# EAGLE board bbwmixer (EAGLE 9.6.2)
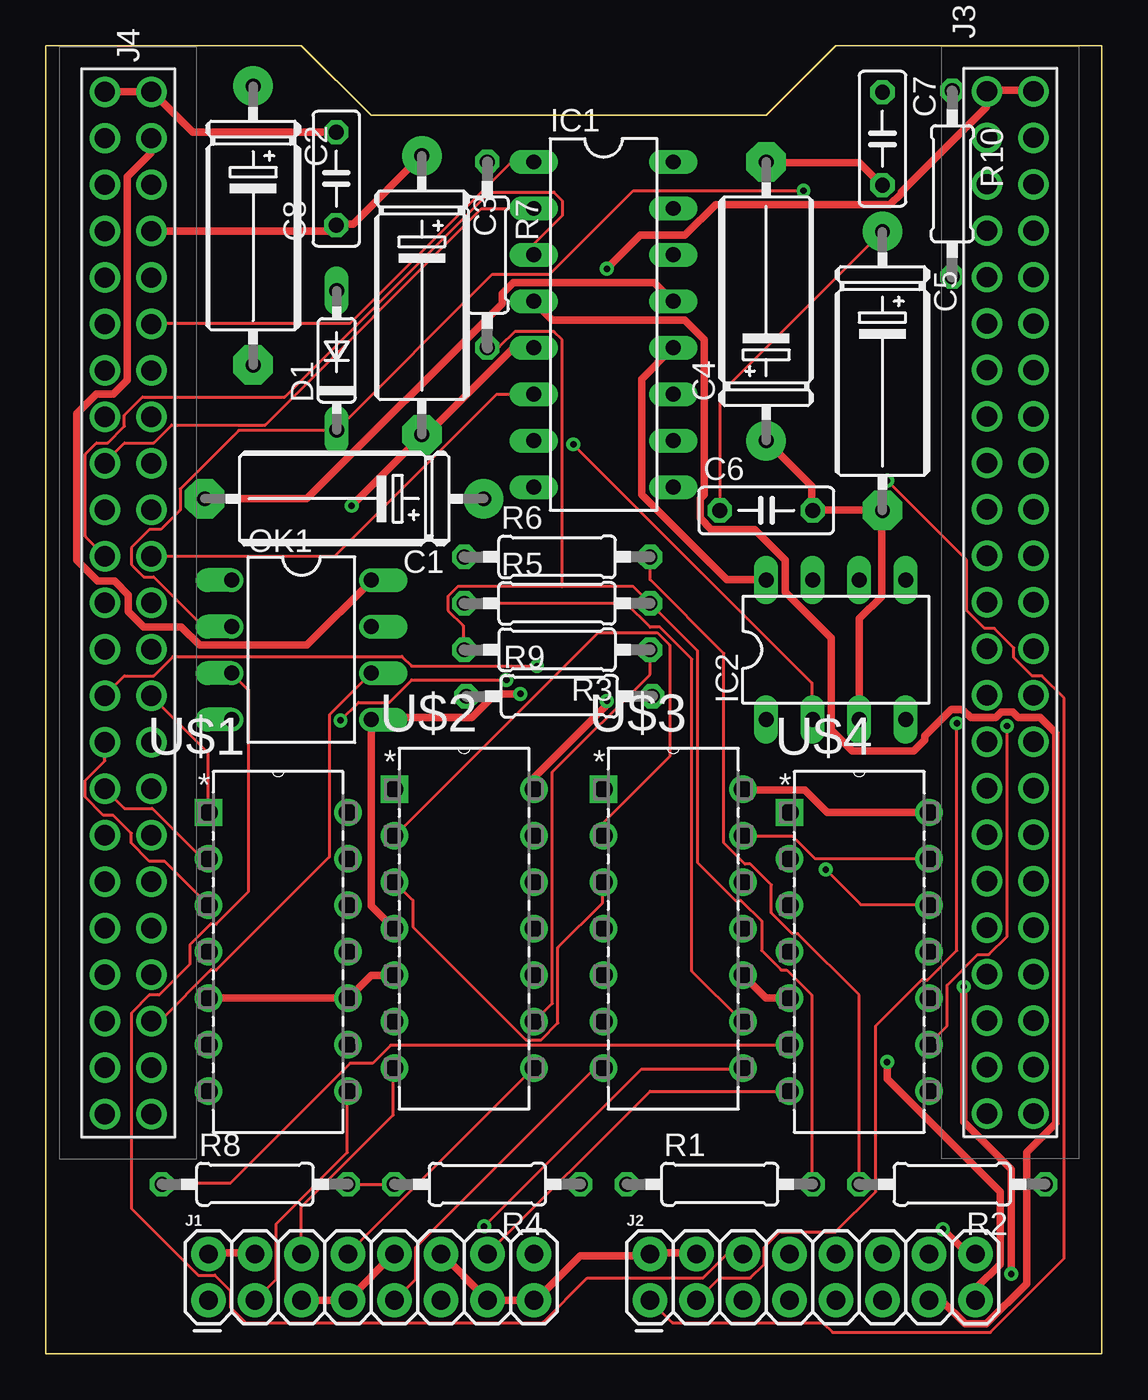
[diagram p0: board, top side]
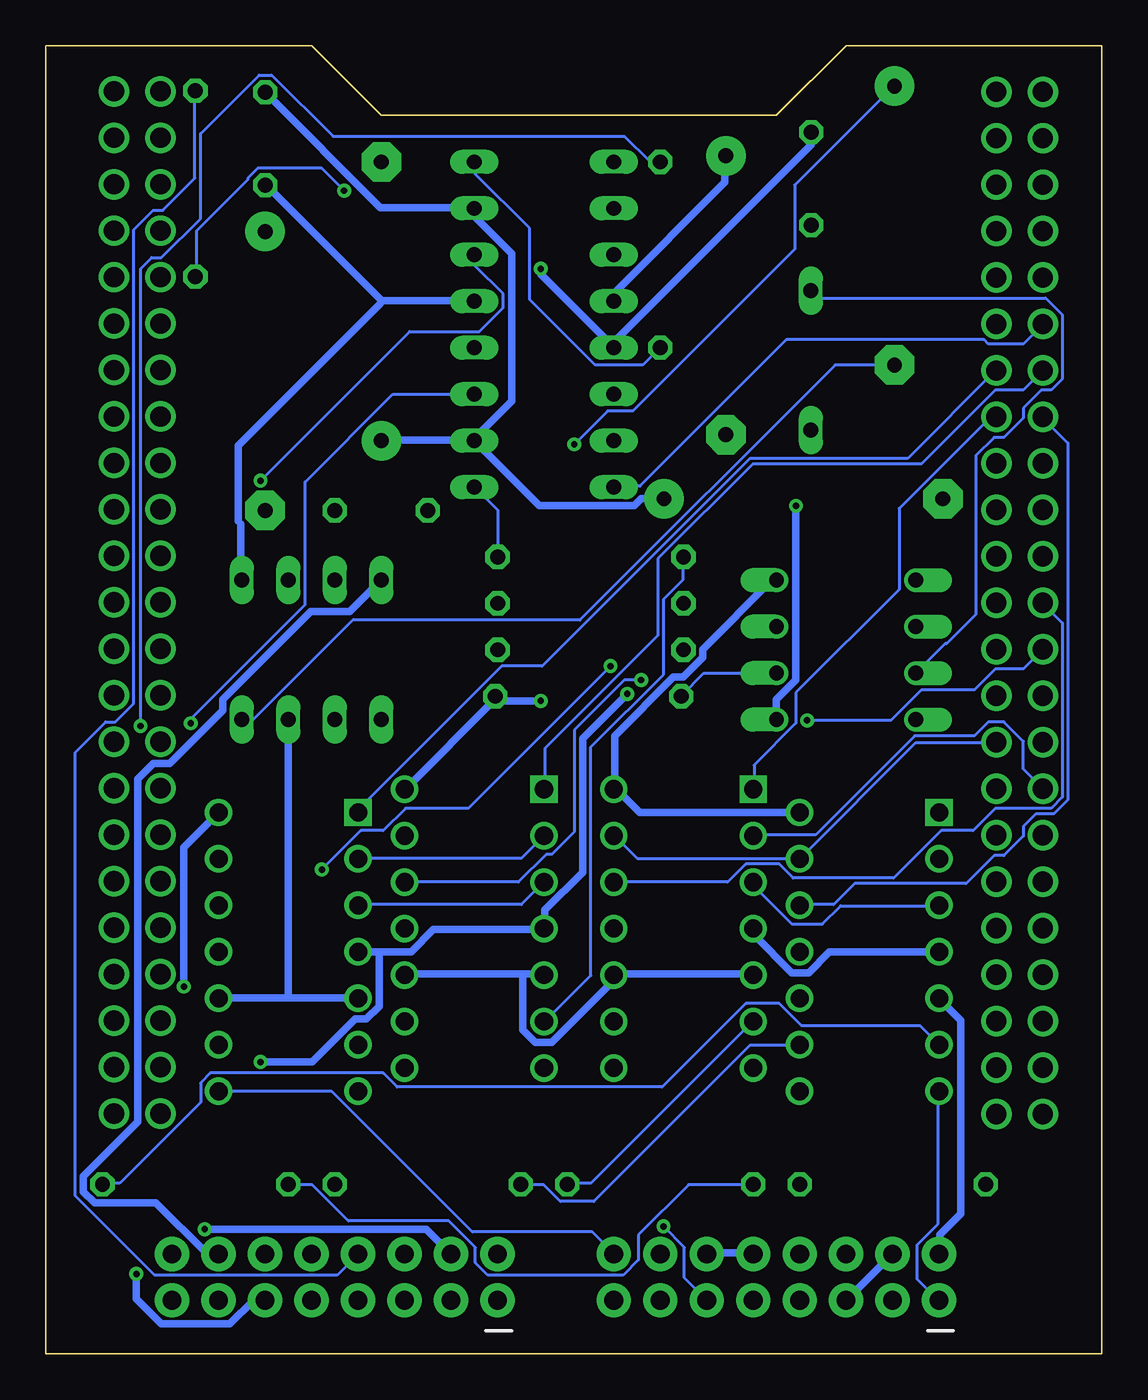
[diagram p1: board, bottom side, seen from below]

Size 57.71 x 71.5 mm. Coordinates in mm from the lower left corner, seen from the top.
Outline: 43.18,71.5 39.37,67.69 17.78,67.69 13.97,71.5 0,71.5 0,0 57.71,0 57.71,71.5 43.18,71.5
Copper layers (1*16): Top 0.035mm / dielectric 1.5mm / Bottom 0.035mm
Design rules "default": minimum track width 6mil, minimum drill 0.35mm, track to track 6mil, track to pad 6mil, pad to pad 6mil, via to via 6mil, smd to smd 6mil, copper to edge 40mil, drill to drill 6mil, minimum pad ring 10mil, minimum via ring 8mil, stop-mask expansion 4mil, vias tented up to drill 0mil, thermal gap 10mil
Net classes: 0 DGND: width 0.152 mm; 1 gordis: width 0.406 mm

## Footprints (pad centres in the part's own frame; a part is rotated, then mirrored left to right if it is on the bottom)
E15-5 = drill 0.813 pad 2.159: + -7.62,0 | drill 0.813 pad 2.159 octagon: - 7.62,0
C050-025X075 = drill 0.813 octagon: 1 -2.54,0; 2 2.54,0
DO35-7 = drill 0.813 long: A 3.81,0; C -3.81,0
DIL16 = drill 0.813 long: 1 -8.89,-3.81; 2 -6.35,-3.81; 3 -3.81,-3.81; 4 -1.27,-3.81; 5 1.27,-3.81; 6 3.81,-3.81; 7 6.35,-3.81; 8 8.89,-3.81; 9 8.89,3.81; 10 6.35,3.81; 11 3.81,3.81; 12 1.27,3.81; 13 -1.27,3.81; 14 -3.81,3.81; 15 -6.35,3.81; 16 -8.89,3.81
DIL08 = drill 0.813 long: 1 -3.81,-3.81; 2 -1.27,-3.81; 3 1.27,-3.81; 4 3.81,-3.81; 5 3.81,3.81; 6 1.27,3.81; 7 -1.27,3.81; 8 -3.81,3.81
2X8 = drill 1.016 pad 1.88: 1 0,0; 2 0,2.54; 3 2.54,0; 4 2.54,2.54; 5 5.08,0; 6 5.08,2.54; 7 7.62,0; 8 7.62,2.54; 9 10.16,0; 10 10.16,2.54; 11 12.7,0; 12 12.7,2.54; 13 15.24,0; 14 15.24,2.54; 15 17.78,0; 16 17.78,2.54
M20-9982346 = drill 1.11 pad 1.65: 1 0,0; 2 0,2.54; 3 2.54,0; 4 2.54,2.54; 5 5.08,0; 6 5.08,2.54; 7 7.62,0; 8 7.62,2.54; 9 10.16,0; 10 10.16,2.54; 11 12.7,0; 12 12.7,2.54; 13 15.24,0; 14 15.24,2.54; 15 17.78,0; 16 17.78,2.54; 17 20.32,0; 18 20.32,2.54; 19 22.86,0; 20 22.86,2.54; 21 25.4,0; 22 25.4,2.54; 23 27.94,0; 24 27.94,2.54; 25 30.48,0; 26 30.48,2.54; 27 33.02,0; 28 33.02,2.54; 29 35.56,0; 30 35.56,2.54; 31 38.1,0; 32 38.1,2.54; 33 40.64,0; 34 40.64,2.54; 35 43.18,0; 36 43.18,2.54; 37 45.72,0; 38 45.72,2.54; 39 48.26,0; 40 48.26,2.54; 41 50.8,0; 42 50.8,2.54; 43 53.34,0; 44 53.34,2.54; 45 55.88,0; 46 55.88,2.54
DIL08' = drill 0.813 offset: 1 -3.81,-3.81; 2 -1.27,-3.81; 3 1.27,-3.81; 4 3.81,-3.81; 5 3.81,3.81; 6 1.27,3.81; 7 -1.27,3.81; 8 -3.81,3.81
0207/10 = drill 0.813 octagon: 1 -5.08,0; 2 5.08,0
DIP254P762X533-14 = drill 0.991 square: 1 -7.62,15.24 | drill 0.991: 2 -7.62,12.7; 3 -7.62,10.16; 4 -7.62,7.62; 5 -7.62,5.08; 6 -7.62,2.54; 7 -7.62,0; 8 0,0; 9 0,2.54; 10 0,5.08; 11 0,7.62; 12 0,10.16; 13 0,12.7; 14 0,15.24

## Placement (x,y rotation side)
C1  10uF  [E15-5]  16.31,46.74 180 top
C2  10uF  [E15-5]  11.33,61.67 270 top
C3  10uF  [E15-5]  20.55,57.86 270 top
C4  10uF  [E15-5]  39.37,57.53 90 top
C5  10uF  [E15-5]  45.72,53.72 270 top
C6  100nF  [C050-025X075]  39.37,46.1 0 top
C7  100nF  [C050-025X075]  45.72,66.42 270 top
C8  100nF  [C050-025X075]  15.88,64.24 90 top
D1  1N4148DO35-7  [DO35-7]  15.9,54.31 90 top
IC1  PGA2311P  [DIL16]  30.48,56.26 270 top
IC2  ICL7660CPA  [DIL08]  43.18,38.48 0 top
J1  [2X8]  8.89,2.92 0 top
J2  [2X8]  33.02,2.92 0 top
J3  M20-9982346  [M20-9982346]  51.44,69.01 270 top
J4  M20-9982346  [M20-9982346]  3.23,68.99 270 top
OK1  6N138  [DIL08']  13.97,38.48 270 top
R1  180K  [0207/10]  36.83,9.27 0 top
R2  180K  [0207/10]  49.53,9.27 180 top
R3  180K  [0207/10]  27.94,38.48 180 top
R4  180K  [0207/10]  24.13,9.27 180 top
R5  180K  [0207/10]  27.94,41.02 0 top
R6  180K  [0207/10]  27.94,43.56 0 top
R7  180K  [0207/10]  24.13,60.07 270 top
R8  180K  [0207/10]  11.43,9.27 0 top
R9  280  [0207/10]  28.07,35.94 0 top
R10  220  [0207/10]  49.53,63.96 270 top
U$1  MCP4251-103E/P  [DIP254P762X533-14]  16.51,14.35 0 top
U$2  MCP4251-103E/P  [DIP254P762X533-14]  26.67,15.62 0 top
U$3  MCP4251-103E/P  [DIP254P762X533-14]  38.1,15.62 0 top
U$4  MCP4251-103E/P  [DIP254P762X533-14]  48.26,14.35 0 top

## Library data of the parts
C1-C8 = rcl; SPICEPREFIX: C
D1 = diode
IC1 = PGA2311
IC2 = maxim; MF: INTERSIL; MPN: ICL7660CPA; OC_FARNELL: 1018170; OC_NEWARK: 06F7441
J1 J2 = SparkFun-Connectors
J3 J4 = SamacSys_Parts; DESCRIPTION: 2.54mm (0.1") Pitch DIL Vertical Throughboard Pin Header, 6.1mm mating pin height, tin, 23+23 contacts; HEIGHT: mm; MANUFACTURER_NAME: Harwin; MANUFACTURER_PART_NUMBER: M20-9982346; MOUSER_PART_NUMBER: 855-M20-9982346; MOUSER_PRICE-STOCK: https://www.mouser.co.uk/ProductDetail/Harwin/M20-9982346?qs=vF78I%252BjhbY%2FXqZboSp3B%2Fw%3D%3D
OK1 = optocoupler; MF: VISHAY/TELEFUNKEN; MPN: 6N138; OC_FARNELL: 9860150; OC_NEWARK: 35K5294
R1-R10 = rcl; SPICEPREFIX: R
U$1-U$4 = MCP4251-103E_P; AVAILABILITY: In Stock; DESCRIPTION: Digital Potentiometer ICs Dual 8B V SPI POT; MF: Microchip Technology / Atmel; MP: MCP4251-103E/P; PACKAGE: None; PRICE: None; PURCHASE-URL: https://pricing.snapeda.com/search/part/MCP4251-103E/P/?ref=eda

## Nets
+3.3V [gordis]: J2.11 J4.4 OK1.8 R9.2 U$1.14 U$2.14 U$3.14 U$4.14
+5V/1 [gordis]: C3.+ C8.1 IC1.4 J2.13 J4.8
+5V/2 [gordis]: IC1.12 IC2.8 J2.14
-5V [gordis]: C1.- C4.- C7.2 IC1.13 IC2.5
AGND [gordis]: C1.+ C4.+ C5.- C6.2 C7.1 IC1.10 IC1.15 IC2.3 J1.2 J1.4 J1.5 J1.7 J1.10 J1.12 J1.13 J1.15 J2.2 J2.4 J2.16 U$1.5 U$1.10 U$2.5 U$2.10 U$3.5 U$3.10 U$4.5 U$4.10
DGND [gordis]: C3.- C8.2 IC1.5 J2.15 J3.1 J3.2 J4.1 J4.2 OK1.5 U$1.4 U$2.4 U$3.4 U$4.4
N$1: C2.+ IC2.2
N$2: C2.- IC2.4
N$4: C5.+ C6.1
N$5: R1.1 U$1.9
N$6: R2.1 U$1.6
N$7: R3.1 U$2.9
N$8: R4.1 U$2.6
N$9: R5.1 U$3.9
N$10: R6.1 U$3.6
N$11: R7.1 U$4.9
N$12: R8.1 U$4.6
N$13: IC1.16 R1.2 R3.2 R5.2 R7.2
N$14: IC1.9 R2.2 R4.2 R6.2 R8.2
N$15: J4.30 U$1.13 U$2.13
N$16: J4.31 U$1.2 U$2.2 U$3.2 U$4.2
N$17: J1.3 U$1.8
N$18: J4.29 U$1.3 U$2.3 U$3.3 U$4.3
N$19: J1.1 U$1.7
N$20: J1.8 U$2.8
N$21: J1.6 U$2.7
N$22: J1.9 U$3.7
N$23: J1.11 U$3.8
N$24: J1.14 U$4.7
N$25: J1.16 U$4.8
N$26: IC1.14 J2.1
N$27: IC1.11 J2.3
N$30: IC1.2 J4.17
N$31: IC1.3 J4.21
N$32: IC1.6 J4.22
N$33: IC1.8 J4.11
N$34: IC1.1 J4.12
N$35: J4.15 U$1.12
N$36: J4.23 U$2.12
N$37: J4.25 U$3.12
N$38: J4.27 U$4.12
N$39: J4.28 U$1.1
N$40: J4.16 U$2.1
N$41: J4.13 U$3.1
N$42: J4.14 U$4.1
N$43: U$3.13 U$4.13
N$45: J4.42 OK1.6 R9.1
N$46: D1.A J2.6 OK1.3
N$47: D1.C OK1.2 R10.2
N$49: J2.8 R10.1

## Tracks (layer width: path | path; a pad name or v marks a point on that pad's centre or on a via)
+3.3V  (via drill 0.35)
  Top 0.406: U$4.14 42.7,29.59 41.48,30.81 38.12,30.81 U$3.14 | v52.76,4.37 52.76,10.08 50.17,12.68 v50.17,20.07 | J4.4 5.74,66.4 5.74,65.63 4.45,64.34 4.45,53.21 3.68,52.45 2.77,52.45 1.7,51.38 1.7,43.38 2.85,42.24 3.76,42.24 4.52,41.48 4.52,40.56 5.36,39.73 7.42,39.73 8.41,38.73 14.28,38.73 17.78,42.24 OK1.8 | v30.66,35.69 30.66,35.46 26.7,31.5 26.7,30.89 U$2.14
  Bottom 0.406: U$3.14 38.05,30.89 33.17,35.76 33.17,35.92 R9.2 33.02,35.69 v30.66,35.69 | J2.11 46.36,2.92 47.65,1.63 51.38,1.63 52.76,3 v52.76,4.37 | v50.17,20.07 50.17,27.69 U$4.14 | OK1.8 17.78,42.24 18.09,42.24 21.82,38.51 21.82,38.05 22.89,36.98 23.42,36.98 26.62,33.78 26.62,30.89 U$2.14 26.47,30.81 25.25,29.59 U$1.14
+5V/1
  Top 0.406: C3.+ 20.52,65.48 16.79,61.75 15.88,61.75 C8.1 15.72,61.59 15.49,61.37 J4.8 | J2.13 48.95,2.92 50.24,1.63 51.38,1.63 53.59,3.83 53.59,11 55.19,12.6 55.19,33.93 54.36,34.77 53.14,34.77 52.83,35.08 52.22,35.08 51.92,34.77 50.55,34.77 50.09,35.23 49.48,35.23 48.03,33.78 48.03,33.55 47.42,32.94 44.07,32.94 42.93,34.09 42.93,39.12 40.41,41.63 40.41,43.38 38.73,45.06 36.37,45.06 35.76,45.67 35.76,46.74 35.99,46.96 35.99,55.42 34.92,56.49 27.69,56.49 26.7,57.48 IC1.4
  Bottom 0.406: IC1.4 26.62,57.56 26.62,58.01 20.6,64.03 20.6,65.48 C3.+
+5V/2
  Top 0.406: IC2.8 39.34,42.32 37.21,42.32 32.56,46.96 32.56,53.29 34.24,54.97 IC1.12
  Bottom 0.406: IC2.8 41.1,40.56 43.23,40.56 48.03,35.76 48.03,35.15 50.93,32.26 51.84,32.26 52.68,31.42 52.68,12.68 55.65,9.7 55.65,8.86 55.04,8.25 51.69,8.25 48.95,5.51 48.26,5.51 J2.14
-5V
  Top 0.406: C1.- 14.28,46.74 24.94,57.4 24.94,57.94 25.55,58.55 33.25,58.55 34.24,57.56 IC1.13 | C4.- 39.42,65.1 44.45,65.1 45.67,63.88 C7.2
  Bottom 0.406: 39.34,57.56 34.31,57.56 IC1.13 | 39.34,57.56 45.67,63.88 C7.2 | IC2.5 47.04,42.32 47.04,45.36 47.19,45.52 47.19,49.63 39.42,57.4 39.34,57.56
AGND  (via drill 0.35)
  Top 0.406: J2.4 35.53,5.51 33.02,5.51 J2.2 32.87,5.36 29.21,5.36 26.85,3 J1.15 J1.13 24.03,3.07 21.59,5.51 J1.12 | v49.02,6.81 50.32,5.51 50.78,5.51 J2.16 | J1.2 8.94,5.51 11.38,5.51 J1.4 | J1.5 J1.7 16.64,3.07 19,5.44 J1.10 | U$1.5 8.94,19.46 16.49,19.46 U$1.10 16.64,19.53 17.78,20.68 19,20.68 U$2.5 | U$3.10 39.34,19.46 40.64,19.46 U$4.5 | IC2.3 44.45,40.18 45.67,41.4 45.67,46.05 C5.- 45.52,46.13 41.94,46.13 C6.2 41.86,46.28 41.86,47.42 C4.+
  Bottom 0.406: v49.02,6.81 36.91,6.81 J2.4 | J1.10 19.07,5.51 21.59,5.51 J1.12 | J1.5 J1.4 | U$2.5 19.07,20.75 26.62,20.75 U$2.10 26.77,20.52 26.77,20.29 30.05,17.02 30.96,17.02 31.65,17.7 31.65,20.75 | 31.65,20.75 38.05,20.75 U$3.10 | 31.65,20.75 30.5,20.75 U$3.5 | 44.45,19.46 40.64,19.46 U$4.5 | 44.45,19.46 48.26,19.46 U$4.10 | C7.1 39.42,62.66 34.31,62.66 IC1.15 34.24,62.43 34.24,62.13 32.26,60.15 32.26,52.07 34.24,50.09 IC1.10 | IC1.10 34.31,49.94 39.34,49.94 C4.+ | C1.+ 25.17,46.74 25.55,46.35 30.73,46.35 IC1.10 | IC2.3 44.45,19.46 | J1.2 8.86,5.51 8.86,6.5 7.72,7.64 7.72,18.24 8.86,19.38 U$1.5
DGND  (via drill 0.35)
  Top 0.406: v45.97,15.95 45.97,15.04 52.15,8.86 52.15,4.9 50.85,3.61 50.85,2.92 J2.15 | U$2.4 19,23.27 17.78,24.49 OK1.5 17.93,34.77 23.27,34.77 24.56,36.07 v25.93,36.07 | C8.2 8.03,66.78 5.82,68.99 J4.2 J4.1 | J3.2 53.98,69.06 51.46,69.06 J3.1 51.38,68.83 51.38,68.15 46.74,63.5 46.74,63.42 46.13,62.81 36.6,62.81 34.92,61.14 32.49,61.14 v30.66,59.31 | IC1.5 26.62,54.97 25.55,54.97 20.83,50.24 C3.- 20.45,50.09 v16.71,46.35
  Bottom 0.406: U$4.4 39.5,21.97 | 39.5,21.97 37.74,21.97 36.53,23.19 30.5,23.19 U$3.4 30.43,23.42 30.43,24.26 28.37,26.31 28.37,33.63 v25.93,36.07 | v45.97,15.95 43.16,15.95 40.79,18.31 40.18,18.31 39.5,19 39.5,21.97 | U$1.4 14.88,21.97 16.03,20.83 16.94,20.83 19,22.88 19,23.19 U$2.4 | v30.66,59.31 30.66,59 26.7,55.04 IC1.5 26.7,55.27 15.88,66.09 C8.2 | OK1.5 17.78,35.76 16.71,36.83 v16.71,46.35
N$1  (via drill 0.35)
  Top 0.152: v28.83,49.71 41.86,36.68 41.86,34.7 IC2.2
  Bottom 0.152: v28.83,49.71 27,51.54 25.63,51.54 16.79,60.38 16.79,63.88 11.38,69.29 C2.+
N$2
  Bottom 0.152: C2.- 14.58,54.05 28.52,40.11 40.95,40.11 46.36,34.7 46.97,34.7 IC2.4
N$4
  Top 0.152: C6.1 36.83,52.45 C5.+
N$5
  Bottom 0.152: R1.1 31.72,9.25 30.5,9.25 29.59,8.33 27.76,8.33 19.23,16.87 16.56,16.87 U$1.9
N$6
  Bottom 0.152: U$1.6 9.93,17.93 16.41,17.93 17.63,19.15 19.46,19.15 24.03,14.58 38.51,14.58 39.27,15.34 48.72,15.34 49.25,14.81 49.25,13.74 53.67,9.32 54.59,9.32 R2.1
N$7
  Top 0.152: R3.1 33.02,37.13 27.69,31.8 27.69,19.15 26.7,18.16 U$2.9
N$8
  Bottom 0.152: R4.1 29.21,9.32 27.92,9.32 19.07,18.16 U$2.6
N$9
  Top 0.152: R5.1 31.72,41.02 33.02,39.73 33.55,39.73 35.31,37.97 35.31,20.9 38.05,18.16 U$3.9
N$10
  Bottom 0.152: R6.1 22.89,43.54 22.89,42.32 23.95,41.25 23.95,37.13 27.92,33.17 27.92,20.68 30.43,18.16 U$3.6
N$11  (via drill 0.35)
  Top 0.152: v52.53,34.31 52.53,22.81 51.54,21.82 50.93,21.82 49.25,20.14 49.25,17.93 48.26,16.94 U$4.9
  Bottom 0.152: v52.53,34.31 52.53,59.31 51.92,59.92 51.38,59.92 49.25,62.05 49.25,66.7 46.05,69.9 45.36,69.9 42.01,66.55 26.09,66.55 24.71,65.18 24.18,65.18 R7.1
N$12
  Top 0.152: R8.1 6.35,9.32 10.08,9.32 16.64,15.88 17.86,15.88 18.85,16.87 40.64,16.87 U$4.6
N$13
  Top 0.152: 28.22,41.94 32.11,41.94 R5.2 35.61,38.43 35.61,26.85 37.67,24.79 37.97,24.79 39.12,23.65 39.12,22.05 40.18,20.98 40.49,20.98 41.86,19.61 41.86,9.32 R1.2 | 28.22,41.94 22.5,41.94 21.97,41.4 21.97,40.64 22.81,39.8 22.81,38.51 R3.2 | 28.22,41.94 28.22,55.42 27.76,55.88 25.63,55.88 24.79,55.04 24.18,55.04 R7.2
  Bottom 0.152: IC1.16 34.24,65.1 34.24,64.49 31.27,61.52 31.27,57.63 27.69,54.05 25.1,54.05 24.18,54.97 R7.2
N$14
  Top 0.152: R8.2 16.56,9.25 19,9.25 R4.2 | R6.2 33.02,42.32 37.06,38.28 37.06,27.91 38.2,26.77 38.51,26.77 39.65,25.63 39.65,24.1 40.79,22.96 41.1,22.96 44.45,19.61 R2.2
  Bottom 0.152: R6.2 33.02,46.13 34.24,47.35 IC1.9 | R2.2 44.45,9.25 43.16,9.25 41.17,7.26 35.69,7.26 34.24,5.82 34.24,4.98 33.55,4.29 26.16,4.29 25.32,5.13 25.32,6.5 22.58,9.25 19.07,9.25 R4.2
N$15
  Bottom 0.152: U$2.13 26.62,28.3 25.4,27.08 16.56,27.08 U$1.13 10.16,33.4 5.82,33.4 J4.30
N$16
  Top 0.152: J4.31 4.29,29.82 5.82,29.82 8.56,27.08 8.86,27.08 U$1.2 | U$3.2 30.5,28.37 30.5,29.06 34.09,32.64 34.09,38.73 33.4,39.42 30.2,39.42 19.07,28.3 U$2.2
  Bottom 0.152: U$3.2 31.72,27.08 40.64,27.08 U$4.2 | J4.31 4.29,31.95 4.29,33.48 5.36,34.54 6.2,34.54 6.96,33.78 10.24,33.78 15.65,28.37 19,28.37 U$2.2
N$17
  Top 0.152: U$1.8 16.49,14.35 16.49,11 12.6,7.11 12.6,4.06 11.46,2.92 J1.3
N$18
  Top 0.152: J4.29 3.23,32.41 2.16,31.34 2.16,30.43 3.15,29.44 3.68,29.44 4.67,28.45 4.67,27.91 5.66,26.92 6.5,26.92 8.86,24.56 U$1.3 | U$3.3 30.43,25.78 30.43,24.64 27.99,22.2 27.99,18.09 27.08,17.17 26.24,17.17 20.07,23.34 20.07,24.79 19.07,25.78 U$2.3
  Bottom 0.152: U$4.3 40.64,24.56 31.72,24.56 30.5,25.78 U$3.3 | U$1.3 8.94,24.49 14.28,24.49 15.27,23.49 16.94,23.49 19,25.55 19,25.78 U$2.3
N$19
  Bottom 0.152: U$1.7 8.94,14.35 8.94,7.11 10.08,5.97 10.08,4.06 8.94,2.92 J1.1
N$20
  Top 0.152: J1.8 U$2.8
N$21
  Top 0.152: J1.6 13.97,8.03 19,13.06 19,15.57 U$2.7
N$22
  Top 0.152: U$3.7 30.43,15.57 29.97,15.57 20.22,5.82 20.22,4.06 19.07,2.92 J1.9
N$23  (via drill 0.35)
  Top 0.152: v23.95,6.96 32.56,15.57 38.05,15.57 U$3.8
  Bottom 0.152: v23.95,6.96 22.81,5.82 22.81,4.14 J1.11
N$24
  Top 0.152: U$4.7 33.02,14.35 J1.14
N$25
  Bottom 0.152: U$4.8 42.09,14.35 34.39,6.65 27.84,6.65 26.7,5.51 J1.16
N$26  (via drill 0.35)
  Top 0.152: v45.97,47.73 50.32,43.38 50.32,40.64 51.31,39.65 51.84,39.65 52.91,38.58 52.91,38.05 53.9,37.06 54.43,37.06 55.65,35.84 55.65,5.21 51.61,1.17 43,1.17 42.47,1.7 34.24,1.7 J2.1
  Bottom 0.152: v45.97,47.73 37.82,55.88 34.01,55.88 32.72,57.17 32.72,57.94 34.24,59.46 34.24,60.07 IC1.14
N$27  (via drill 0.35)
  Top 0.152: v49.78,34.47 49.78,22.05 48.18,20.45 47.88,20.45 45.36,17.93 45.36,8.86 43.16,6.65 40.11,6.65 39.27,5.82 39.27,4.9 38.51,4.14 36.83,4.14 35.61,2.92 J2.3
  Bottom 0.152: IC1.11 38.73,52.45 43.54,47.65 43.54,40.95 49.78,34.7 v49.78,34.47
N$30
  Top 0.152: IC1.2 26.62,62.59 23.8,62.59 11.99,50.77 6.88,50.77 5.89,49.78 4.29,49.78 3.23,48.72 J4.17
N$31
  Top 0.152: IC1.3 26.7,60.07 26.7,60.68 28.22,62.2 28.22,63.04 27.76,63.5 24.26,63.5 13.06,52.3 5.28,52.3 4.29,51.31 4.29,50.7 3.38,49.78 2.77,49.78 2.16,49.17 2.16,44.68 3.23,43.61 J4.21
N$32
  Top 0.152: IC1.6 24.64,52.45 15.8,43.61 5.82,43.61 J4.22
N$33
  Bottom 0.152: IC1.8 26.62,47.42 25.25,47.42 17.25,55.42 6.43,55.42 6.2,55.19 4.29,55.19 3.23,56.26 J4.11
N$34
  Top 0.152: IC1.1 26.62,65.1 25.4,65.1 16.64,56.34 5.82,56.34 J4.12
N$35
  Bottom 0.152: U$1.12 16.49,24.56 14.66,24.56 13.51,25.7 7.42,25.7 5.89,27.23 5.36,27.23 4.29,28.3 4.29,28.83 3.61,29.52 2.62,29.52 1.85,30.28 1.85,49.78 3.23,51.16 J4.15
N$36
  Bottom 0.152: U$2.12 20.45,25.78 19.46,26.77 17.63,26.77 16.87,26.01 11.38,26.01 8.79,28.6 7.04,28.6 5.82,29.82 2.77,29.82 2.16,30.43 2.16,39.95 3.23,41.02 J4.23
N$37  (via drill 0.35)
  Top 0.152: v25.17,36.83 19.99,36.83 18.77,35.61 17.09,35.61 v16.1,34.62
  Bottom 0.152: U$3.12 31.88,25.78 30.35,27.3 30.05,27.3 28.83,28.52 28.83,34.09 26.09,36.83 v25.17,36.83 | v16.1,34.62 11.53,34.62 9.86,36.3 6.96,36.3 5.82,37.44 4.29,37.44 J4.25
N$38  (via drill 0.35)
  Top 0.152: v42.62,26.47 44.53,24.56 48.26,24.56 U$4.12 | v26.85,37.59 19.99,37.59 19.46,38.12 6.96,38.12 5.89,37.06 4.29,37.06 3.23,35.99 J4.27
  Bottom 0.152: v42.62,26.47 40.49,28.6 39.27,28.6 38.05,29.82 34.62,29.82 v26.85,37.59
N$39
  Top 0.152: J4.28 8.86,32.87 8.86,29.59 U$1.1
N$40
  Bottom 0.152: U$2.1 19,30.89 19,32.18 16.71,34.47 16.71,36.14 11.07,41.78 11.07,46.2 6.12,51.16 5.82,51.16 J4.16
N$41
  Bottom 0.152: J4.13 4.29,52.68 5.82,52.68 9.86,48.64 19.07,48.64 24.26,43.46 24.26,39.27 30.43,33.1 30.43,30.89 U$3.1
N$42
  Bottom 0.152: U$4.1 40.64,29.74 32.79,37.59 30.58,37.59 19.23,48.95 10.62,48.95 5.82,53.75 J4.14
N$43
  Top 0.152: U$4.13 48.26,27.08 42.01,27.08 40.79,28.3 38.12,28.3 U$3.13
N$45
  Top 0.152: OK1.6 15.49,34.92 15.49,27.15 9.32,20.98 9.02,20.98 6.27,18.24 5.82,18.24 J4.42
  Bottom 0.152: OK1.6 21.74,37.21 22.96,35.99 R9.1
N$46
  Top 0.152: OK1.3 11.07,36.3 11.07,25.25 9.32,23.49 9.02,23.49 7.87,22.35 7.87,21.29 6.2,19.61 5.66,19.61 4.67,18.62 4.67,7.95 8.33,4.29 9.25,4.29 10.08,3.45 10.08,2.54 10.92,1.7 27.15,1.7 29.59,4.14 35.92,4.14 37.21,5.44 38.05,5.44 J2.6
  Bottom 0.152: OK1.3 8.56,38.81 8.48,38.81 6.88,40.41 6.88,49.1 5.89,50.09 5.36,50.09 4.29,51.16 4.29,51.69 3.3,52.68 2.77,52.68 2.16,53.29 2.16,56.79 3.07,57.71 15.49,57.71 D1.A
N$47  (via drill 0.35)
  Top 0.152: OK1.2 10.16,39.8 8.56,39.8 5.89,42.47 5.36,42.47 4.67,43.16 4.67,44.07 5.66,45.06 6.27,45.06 7.34,46.13 7.34,47.27 10.54,50.47 15.88,50.47 D1.C 24.41,59 27.53,59 32.11,63.58 v41.4,63.58
  Bottom 0.152: v41.4,63.58 42.62,64.8 46.13,64.8 46.66,64.26 46.66,64.19 49.48,61.37 49.48,58.93 R10.2
N$49
  Bottom 0.152: R10.1 49.56,68.99 49.56,64.26 51.31,62.51 51.84,62.51 52.91,61.44 52.91,35.53 53.9,34.54 54.43,34.54 56.11,32.87 56.11,8.64 51.77,4.29 41.78,4.29 40.64,5.44 J2.8